# Altium PCB CH32H417QEU-R1.PcbDoc (part 3 of 6)
Units mm, origin at the board's own origin, x right, y up, seen from the top; angles counter-clockwise.
Board outline 125 x 85 mm, 4 copper layers (Top Layer, Layer 1, Layer 2, Bottom Layer), stack 0.603 mm thick; 271 components, 256 nets, 1068 pads, 903 vias.
Unrouted connection lines stored in the file: 143.
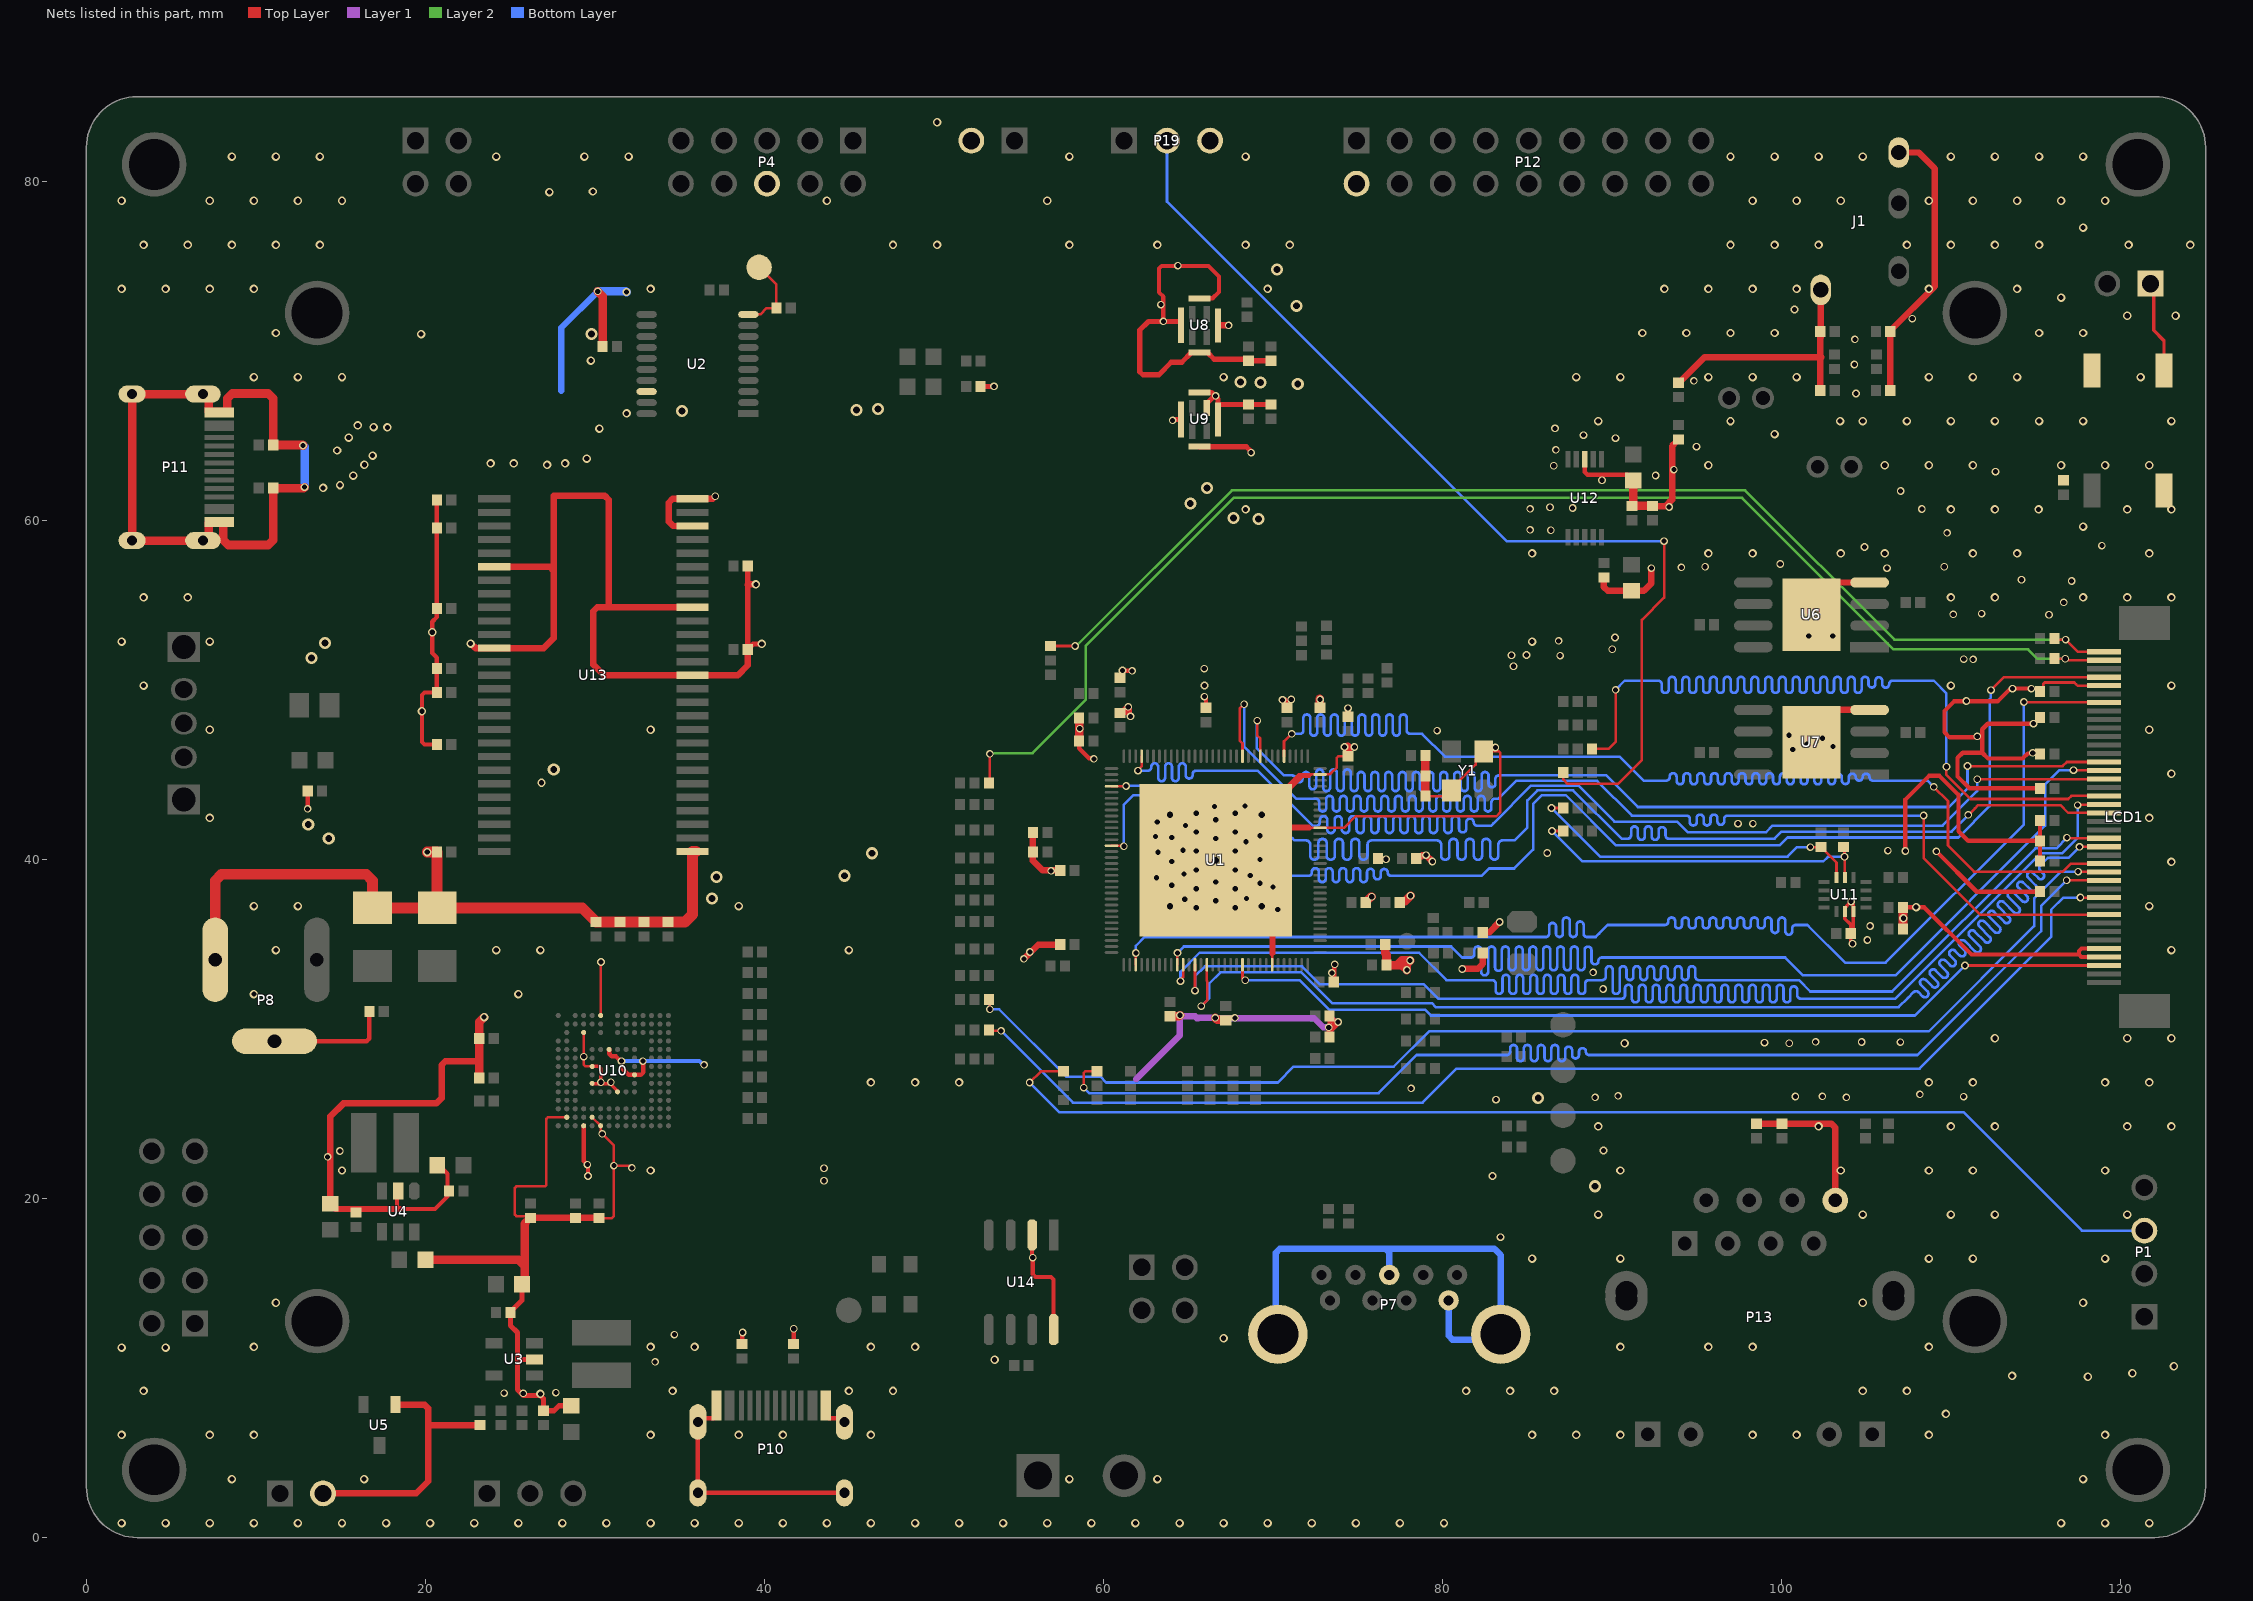
[diagram p5: the nets of this part, all layers, seen from the top]

## Via types
v1: diameter 0.45, hole 0.3, Top Layer to Bottom Layer, tented both sides, 534 vias
v2: diameter 0.5, hole 0.3, Top Layer to Bottom Layer, tented both sides, 320 vias
v3: diameter 0.711, hole 0.406, Top Layer to Bottom Layer, tented both sides, 24 vias
v4: diameter 0.508, hole 0.305, Top Layer to Bottom Layer, tented both sides, 22 vias
v5: diameter 0.7, hole 0.4, Top Layer to Bottom Layer, tented both sides, 3 vias

## Nets (pads, with @x,y where several pads share a name; then routed paths per layer and width w, separated by ;. In a path a pad name is that pad's centre, name@x,y a point inside that pad or via, vN(x,y) a via of type N, cw(c..) or ccw(c..) an arc to the next point about the centre after c; other vN are vias at no path point) (continued)
GND: C1.2 C2.2 C3.2 C4.2 C5.1 C6.2 C7.2 C8.1 C9.2 C10.2 C11.1 C12.1 C13.1 C14.1 C15.1 C16.1 C17.1 C18.2 C19.1 C20.1 C21.2 C22.1 C23.1 C24.1 C25.2 C26.1 C27.1 C28.2 C29.1 C30.2 C31.1 C32.1 C34.2 C35.2 C36.1 C37.1 C38.1 C39.1 C40.1 C41.1 C42.1 C43.1 C46.1 C47.1 C48.1 C49.2 C50.2 C51.1 C52.1 C53.2 C54.2 C55.2 C56.1 C57.1 C58.1 C59.1 C60.1 C61.1 C62.1 C63.1 C64.1 C65.1 C67.1 C69.1 C70.1 C71.1 C72.1 C73.1 C74.1 C75.1 C76.1 C81.1 C82.1 J1.1 J1.4 LCD1.4 LCD1.5 LCD1.36 P3.2 P4.6 P7.0 P7.4 P7.7 P8.2 P8.3 P9.2 P10.0 P10.A1 P10.B1 P11.0 P11.A1 P11.B1 P12.2 P13.8 P19.3 R78.1 R84.1 R86.1 R87.2 R88.2 R89.2 R90.2 R91.2 R107.2 R112.2 R113.2 R114.2 R115.2 R116.2 R117.2 R118.2 R119.2 R121.2 R122.2 R124.2 R125.2 R126.1 R127.2 S1.2 S2.2 U1.0 U1.22 U1.31 U1.122 U2.18 U3.2 U4.2 U5.1 U6.0 U6.4 U7.0 U7.4 U8.5 U9.2 U9.5 U10.A6 U10.C4 U10.E7 U10.G5 U10.H10 U10.J5 U10.K8 U10.N2 U10.N5 U10.P4 U10.P6 U11.6 U11.7 U12.8 U13.6 U13.12 U13.28 U13.41 U13.46 U13.52 U13.54 U14.2 U14.8 Y1.2 Y1.4 | length 608.6
  Top Layer w0.152: C52.1@26.047,18.722 26.047,18.747 26.047,18.852 25.933,18.966 25.358,18.966 25.269,19.055 25.269,20.628 25.358,20.717 27.036,20.717 27.126,20.806 27.126,24.705 27.215,24.794 U10.N2@28.333,24.794 ; v1@29.333,28.413 29.334,28.414 29.334,29.793 U10.C4@29.333,29.794 ; v1(29.336,28.368) 29.333,28.365 29.333,27.907 29.445,27.794 U10.G5@29.833,27.794 ; U10.N5@29.833,24.794 U10.P6@30.333,24.294 30.333,23.99 30.425,23.897 v1(30.425,23.817) ; C54.2@30.246,18.856 30.256,18.846 30.997,18.846 31.116,18.965 v1(31.116,21.939) ; U10.A6@30.333,30.794 30.343,30.805 30.343,33.945 v1(30.354,33.956) ; v1@30.472,23.77 31.116,23.126 v1(31.116,21.939) ; v1(32.171,21.811) 32.09,21.811 31.962,21.939 v1(31.116,21.939) ; U1.0@66.616,39.942 U1.0@69.316,37.242 69.941,36.617 69.941,34.327 ; U1.0@69.763,41.817 69.813,41.867 72.228,41.867 ; U1.0@69.818,35.554 69.824,35.554 69.86,35.518 69.86,34.408 69.941,34.327 ; U1.122@69.941,33.792 69.941,34.327 ; U1.0@70.059,35.476 70.059,34.445 69.941,34.327 ; U1.0@70.532,43.858 U1.0@71.018,44.343 ; U1.0@70.755,44.268 71.504,45.017 71.691,45.017 ; U1.0@71.001,41.741 71.001,41.76 71.04,41.799 72.17,41.799 72.238,41.867 ; U1.0@71.018,44.152 U1.0@71.018,44.343 ; U1.0@71.046,44.177 71.056,44.177 71.766,44.887 ; U1.0@71.091,41.983 72.112,41.983 72.228,41.867 ; C28.2@74.412,46.09 73.848,46.09 73.759,46.001 73.759,45.436 73.41,45.087 73.397,45.087 73.327,45.017 U1.31@72.766,45.017 72.249,45.017 ; C17.1@78.977,43.735 80.176,43.735 Y1.4@80.518,44.077 80.518,44.177 81.945,45.603 81.945,45.903 Y1.2@82.368,46.327 ; Y1.2@82.418,46.377 83.31,46.377 83.4,46.287 83.4,42.788 83.161,42.549 74.863,42.549 74.18,41.867 U1.22@72.766,41.867 72.238,41.867 ; Y1.2@82.425,46.383 Y1.2@82.647,46.606 ; v1@83.051,46.653 83.077,46.58 v1(83.107,46.606) ; R114.2@115.228,49.911 115.43,50.113 115.43,50.359 115.51,50.439 117.259,50.439 117.365,50.333 117.447,50.25 LCD1.36@118.999,50.25 ; U1.0@71.018,44.343 71.561,44.887 ; 71.561,44.887 71.691,45.017 ; 71.561,44.887 71.766,44.887 ; 71.691,45.017 72.249,45.017 ; 71.766,44.887 72.119,44.887 72.249,45.017 ; 72.228,41.867 72.238,41.867
  Top Layer w0.203: U10.J5@29.833,26.794 29.847,26.78 30.511,26.78 30.526,26.766 30.897,26.766 31.211,26.451 31.211,26.442 31.333,26.321 U10.K8@31.333,26.294 ; U10.G5@29.885,27.795 30.229,27.795 30.348,27.676 v1(30.348,26.858) ; v1(104.169,35.028) 104.169,35.094 104.067,35.197 C58.1@104.067,35.642 ; C58.1@104.067,35.642 104.067,36.166 103.728,36.505 U11.6@103.728,36.924 103.728,37.124 103.833,37.23 103.833,37.265 v1(104.093,37.524) 104.093,37.458 104.228,37.323 U11.7@104.228,36.924 104.204,36.9 104.204,35.779 C58.1@104.067,35.642
  Top Layer w0.254: P8.3@11.095,29.284 16.531,29.284 16.68,29.433 C41.1@16.68,31.024 ; v1(13.052,42.982) R87.2@13.052,44.046 ; U4.2@18.217,20.433 18.321,20.537 U4.2@18.321,20.747 ; U4.2@18.321,20.433 18.321,19.531 18.47,19.383 20.559,19.383 21.299,20.123 21.299,21.465 C37.1@20.818,21.947 ; R127.2@20.674,46.781 19.941,46.781 19.792,46.93 19.792,49.705 19.941,49.854 R126.1@20.674,49.854 C75.1@20.674,51.251 20.674,51.903 20.401,52.176 20.401,54.026 20.674,54.299 C73.1@20.674,59.557 C70.1@20.674,61.208 ; U10.P4@29.333,24.294 29.333,22.21 29.59,21.953 v1(29.59,21.326) ; U10.E7@30.833,28.794 30.841,28.786 30.841,28.535 30.99,28.387 31.236,28.387 31.516,28.107 v1(31.562,28.107) 31.562,27.719 31.987,27.294 U10.H10@32.333,27.294 32.704,27.294 32.853,27.443 v1@32.853,28.118 ; P10.A1@37.163,7.792 37.163,7.217 36.99,7.044 36.29,7.044 P10.0@36.068,6.822 P10.0@36.068,2.642 P10.0@44.708,2.642 ; R90.2@38.659,11.416 38.682,11.44 38.682,12.077 v1(38.705,12.1) ; R91.2@41.707,11.416 41.716,11.425 41.716,12.313 v1(41.725,12.322) ; P10.B1@43.613,7.792 43.613,7.217 43.786,7.044 44.486,7.044 P10.0@44.708,6.822 ; v1@55.778,16.516 55.778,16.83 U14.2@55.778,17.856 ; v1(55.82,16.516) 55.82,15.527 55.968,15.378 56.9,15.378 57.048,15.229 U14.8@57.048,12.268 ; C6.2@58.554,46.987 58.554,46.557 59.138,45.973 59.385,45.973 v1(59.423,45.936) ; C7.2@60.971,48.647 C7.2@60.996,48.647 ; C8.1@60.971,50.715 61.075,50.819 61.075,51.108 v1(61.113,51.145) 61.122,51.136 61.67,51.136 v1(61.679,51.127) ; v1(63.526,71.738) 63.526,73.198 63.272,73.452 63.272,74.858 63.421,75.007 66.184,75.007 66.803,74.388 66.803,73.475 66.429,73.101 U8.5@65.659,73.101 ; v1(65.943,49.604) 66.035,49.512 C10.2@66.035,48.946 ; v1@70.726,49.417 70.763,49.38 70.763,48.996 C12.1@70.813,48.946 ; v1@72.705,49.379 72.727,49.379 72.75,49.356 v1@72.759,49.348 ; C15.1@72.75,48.946 72.759,48.955 v1@72.759,49.348 ; v1(72.767,49.438) 72.759,49.43 v1@72.759,49.348 ; C13.1@73.28,29.537 73.329,29.585 73.329,29.908 73.329,30.728 C14.1@73.329,30.753 ; C16.1@73.569,32.762 73.6,32.793 73.6,33.778 v1(73.632,33.809) ; C29.1@74.412,48.42 C29.1@74.415,48.423 ; v1@74.415,48.927 v1(74.418,48.93) ; U12.8@88.379,63.607 88.379,62.856 88.546,62.689 90.904,62.689 C65.1@91.242,62.351 ; C59.1@107.154,37.175 108.402,37.175 111.186,34.391 117.531,34.391 ; v1(107.292,40.502) 107.292,43.541 108.683,44.932 109.304,44.932 110.425,43.811 110.425,41.669 110.997,41.097 R119.2@115.228,41.097 ; v1(109.119,40.478) 111.498,38.1 R117.2@115.228,38.1 ; v1(114.723,50.08) 113.487,50.08 112.733,49.325 110.164,49.325 109.602,48.763 109.602,47.502 109.903,47.201 111.824,47.201 ; v1(114.804,46.288) 114.766,46.251 114.505,46.251 114.207,45.953 112.169,45.953 111.824,46.297 ; v1(114.846,48.008) 112.152,48.008 111.824,47.681 111.824,47.201 ; R116.2@115.156,42.425 115.228,42.353 R116.2@115.228,42.291 R119.2@115.228,41.097 ; R118.2@115.228,39.903 R119.2@115.228,41.097 ; R115.2@115.228,44.196 111.065,44.196 110.369,44.892 110.369,45.996 110.67,46.297 111.824,46.297 ; LCD1.4@118.999,34.25 117.672,34.25 117.531,34.391 ; LCD1.5@118.999,34.75 117.68,34.75 117.531,34.602 117.531,34.391 ; C7.2@60.996,48.647 61.311,48.962 v1@61.413,48.962 ; C7.2@60.996,48.647 61.406,48.647 61.535,48.517 v1@61.589,48.517 ; v1@61.413,48.962 v1@61.432,48.98 ; v1@61.413,48.962 61.413,48.751 61.384,48.722 v1@61.551,48.555 ; v1@61.432,48.98 v1(61.451,48.999) v1@61.451,48.962 ; v1@61.432,48.98 v1@61.451,48.962 ; v1@61.451,48.962 61.488,48.924 v1@61.488,48.908 ; v1@61.451,48.962 61.451,48.946 v1@61.488,48.908 ; v1@61.488,48.908 61.551,48.846 v1@61.551,48.608 ; v1@61.488,48.908 61.488,48.67 v1@61.551,48.608 ; v1@61.551,48.555 v1@61.551,48.608 ; v1@61.551,48.555 v1@61.589,48.517 ; v1@61.551,48.608 61.589,48.57 v1@61.589,48.517 ; 111.824,46.297 111.824,47.201
  Top Layer w0.3: C32.1@25.697,14.936 25.697,14 25.007,13.31 C31.1@25.007,13.285 25.007,12.518 25.429,12.096 25.429,10.334 ; U3.2@26.431,10.509 25.605,10.509 25.429,10.334 ; C34.2@28.603,7.776 27.87,7.776 27.577,7.483 C35.2@26.952,7.483 26.952,8.208 26.777,8.384 25.77,8.384 25.429,8.725 25.429,10.334
  Top Layer w0.305: C71.1@39.011,52.394 C71.1@39.011,52.419 ; C72.1@39.011,57.296 39.011,56.213 C71.1@39.011,52.419 ; v2(39.833,52.717) 39.334,52.717 39.183,52.567 39.158,52.567 C71.1@39.011,52.419 ; R84.1@52.744,67.903 v1(53.536,67.903) ; v1(64.071,65.9) 64.111,65.9 64.164,65.953 U9.5@64.559,65.953 ; U8.5@64.559,71.501 64.559,71.716 64.536,71.738 v1(63.526,71.738) 62.652,71.738 62.135,71.222 62.135,68.773 62.314,68.594 63.262,68.594 63.992,69.325 64.608,69.325 65.184,69.901 U8.5@65.659,69.901 66.134,69.901 66.53,69.505 67.287,69.505 C82.1@68.483,69.505 ; U9.5@65.659,64.353 65.669,64.343 68.419,64.343 68.702,64.06 v1(68.702,63.997) ; U9.5@65.659,67.553 66.364,67.553 66.568,67.35 v1(66.607,67.35) ; U9.2@66.084,66.628 66.084,66.903 66.503,67.322 66.579,67.322 v1(66.607,67.35) ; U9.5@66.751,66.846 66.751,67.166 66.607,67.31 v1(66.607,67.35) ; U9.5@66.759,65.953 66.759,66.846 C46.1@69.915,66.846 ; C82.1@68.483,69.415 C81.1@69.869,69.415
  Top Layer w0.381: P9.2@14.094,2.687 14.172,2.609 19.452,2.609 20.169,3.326 20.169,7.618 19.946,7.841 U5.1@18.236,7.841 ; C38.1@14.392,19.697 14.392,24.842 15.159,25.61 20.64,25.61 20.95,25.92 20.95,27.871 21.173,28.094 23.173,28.094 ; C38.1@14.706,19.383 18.47,19.383 ; 20.185,6.604 20.215,6.633 R86.1@23.209,6.633 ; v2(22.664,52.729) 22.696,52.729 22.955,52.47 U13.12@24.064,52.47 26.976,52.47 27.555,53.05 27.555,57.047 ; U13.6@24.064,57.27 27.332,57.27 27.555,57.047 ; C52.1@25.918,18.593 C52.1@26.047,18.722 ; C52.1@26.047,18.747 26.157,18.856 C52.1@26.182,18.856 C53.2@28.849,18.856 C54.2@30.246,18.856 ; U13.46@35.748,54.87 30.81,54.87 ; U13.52@35.748,59.67 34.614,59.67 34.352,59.933 34.352,61.047 34.575,61.27 U13.54@35.748,61.27 36.942,61.27 v1(37.093,61.422) ; C71.1@39.011,52.394 39.011,51.453 38.428,50.87 U13.41@35.748,50.87 30.525,50.87 29.897,51.497 29.897,54.638 30.129,54.87 30.81,54.87 ; 39.011,56.213 39.023,56.225 v2(39.489,56.225) ; v1(55.296,34.135) 56.139,34.977 C1.2@57.438,34.977 ; C4.2@55.832,41.603 C3.2@55.832,40.433 55.832,39.928 56.408,39.352 C2.2@57.438,39.352 ; U8.5@66.759,71.501 v1(67.376,71.501) ; v1@73.329,29.908 v1(73.832,30.411) 73.818,30.424 73.633,30.424 C14.1@73.329,30.728 ; C29.1@74.415,48.423 v1@74.415,48.927 ; C26.1@78.445,40.065 78.445,40.09 78.554,40.2 78.759,40.2 78.798,40.239 79.003,40.239 v1(79.016,40.252) ; v1(79.016,40.252) 79.365,39.904 v1@79.358,39.897 ; v1(81.154,33.541) 82.07,33.541 82.368,33.839 C18.2@82.368,34.494 ; C21.2@82.368,35.695 82.739,35.695 v1(83.356,36.312) ; C63.1@89.506,56.631 89.506,56.072 89.729,55.849 C64.1@91.138,55.849 91.87,55.849 92.311,56.29 v1(92.311,57.18) ; C62.1@92.235,60.836 93.133,60.836 93.528,61.23 93.528,64.383 93.779,64.635 93.779,64.66 93.889,64.769 R121.2@93.914,64.769 ; R124.2@93.914,68.122 93.939,68.122 95.442,69.625 102.272,69.625 ; C57.1@98.503,24.409 C56.1@100.002,24.409 102.935,24.409 103.158,24.186 P13.8@103.158,19.888 ; U6.0@102.252,56.394 102.309,56.337 U6.4@105.181,56.337 ; R125.2@102.272,67.651 102.272,69.625 ; U7.0@102.293,48.811 102.301,48.819 U7.4@105.181,48.819 ; 102.299,70.793 102.3,70.794 C69.1@102.3,71.043 ; J1.1@102.3,73.6 C69.1@102.3,71.043 ; 102.344,69.625 102.272,69.625 ; C69.1@102.351,71.043 C69.1@102.3,71.043 ; R122.2@106.399,67.651 106.399,70.947 C67.1@106.449,70.997 ; C67.1@106.399,71.153 106.399,71.178 109.022,73.801 109.022,80.755 108.077,81.7 106.92,81.7 J1.4@106.806,81.815 ; 27.555,57.047 27.555,61.444 30.587,61.444 30.81,61.221 30.81,54.87 ; 102.272,69.625 102.272,71.018 102.296,71.043 C69.1@102.3,71.043
  Top Layer w0.508: P11.0@2.696,58.575 P11.0@2.696,67.45 P11.0@6.876,67.45 6.997,67.45 7.225,67.223 7.225,66.401 8.311,66.401 8.311,67.19 8.609,67.488 10.721,67.488 11.018,67.19 R88.2@11.018,64.445 12.752,64.445 v1(12.777,64.42) ; P11.0@2.696,58.81 P11.0@6.876,58.81 6.997,58.81 7.225,59.037 7.225,59.859 8.067,59.859 8.067,58.846 8.365,58.549 10.721,58.549 11.018,58.846 R89.2@11.018,61.905 12.807,61.905 v1(12.868,61.966) ; C40.1@19.997,16.389 25.492,16.389 25.848,16.033 ; R107.2@23.173,27.111 23.173,28.094 C51.1@23.173,29.45 23.173,30.413 v2(23.46,30.7) ; C32.1@25.848,14.936 25.848,16.033 ; C52.1@25.918,18.593 25.848,18.523 25.848,16.033 ; v1(30.162,73.507) 30.449,73.22 C30.2@30.449,70.259 ; C6.2@58.554,46.987 C5.1@58.554,48.34 ; C9.2@63.903,30.748 64.443,30.748 v1(64.506,30.811) ; v1(66.585,30.654) 66.692,30.547 67.158,30.547 C11.1@67.204,30.501 ; C15.1@72.75,48.946 72.75,49.356 72.75,49.474 v1@72.757,49.48 ; v1@74.409,46.636 74.409,46.092 C28.2@74.412,46.09 ; C25.2@75.464,37.469 75.464,37.494 75.771,37.8 v1(75.816,37.8) ; C23.1@76.608,34.972 76.608,34.459 76.684,34.382 C22.1@76.684,33.763 77.308,33.763 ; C24.1@77.464,37.469 77.464,37.494 77.51,37.54 77.778,37.54 v1(78.099,37.861) ; C17.1@78.977,43.735 C20.1@78.977,44.923 R78.1@78.977,46.128 ; C65.1@91.242,62.351 91.242,60.934 C61.1@91.166,60.858 C62.1@92.374,60.858 ; C60.1@107.154,35.905 107.154,36.515 v2(107.17,36.531) 107.154,36.547 C59.1@107.154,37.175 ; 77.308,33.763 77.588,34.043 v1(78.083,34.043) 77.889,33.849 v1(77.889,33.478) 77.603,33.763 77.308,33.763
  Top Layer w0.635: P8.2@7.595,34.084 7.595,38.75 7.967,39.122 16.508,39.122 16.88,38.75 C43.1@16.88,37.145 C42.1@20.69,37.145 ; v2(20.102,40.435) 20.105,40.433 20.672,40.433 C74.1@20.674,40.431 20.674,37.161 C42.1@20.69,37.145 ; U13.28@35.956,40.47 U13.28@35.748,40.47 35.748,36.76 35.304,36.316 C48.1@34.312,36.316 C49.2@32.899,36.316 C50.2@31.485,36.316 C55.2@30.071,36.316 29.241,37.145 C42.1@20.69,37.145
  Layer 1 w0.381: 61.916,27.043 64.499,29.627 64.499,30.805 v1(64.506,30.811) ; v1@64.506,30.748 65.397,30.748 65.506,30.639 65.598,30.639 65.613,30.654 v1(66.585,30.654) ; v1@66.579,30.639 72.426,30.639 72.954,30.111 73.262,30.111 v1@73.275,30.098 ; v1(73.281,30.098) 73.294,30.098 73.635,30.438 v1@73.812,30.438
  Bottom Layer w0.254: v1(31.562,28.107) v1(32.822,28.107) 36.157,28.107 36.399,27.865 v1@36.45,27.865
  Bottom Layer w0.381: 28.017,67.639 28.011,67.646 28.011,71.356 v1(30.162,73.507) ; P7.0@69.649,12.7 70.166,13.217 70.166,16.81 70.389,17.033 76.628,17.033 ; P7.0@70.08,11.642 P7.0@70.281,11.843 ; P7.7@76.851,15.343 76.851,16.81 76.628,17.033 ; P7.4@80.351,13.843 80.351,11.9 80.574,11.677 P7.0@82.796,11.677 ; P7.0@83.887,12.108 83.421,12.573 83.421,16.664 83.052,17.033 76.628,17.033
  Bottom Layer w0.508: v1(12.777,64.42) 12.868,64.329 v1(12.868,61.966) ; v1(30.162,73.507) 31.823,73.507 v1(31.858,73.472)
  other v1: 24.643,8.518 25.767,8.511 27.695,8.547 33.549,10.364 34.681,11.975 83.414,17.727 43.505,21.051 82.939,21.332 43.505,21.789 29.547,21.996 14.228,22.456 14.951,22.801 89.486,22.831 83.141,25.835 88.991,25.968 103.815,25.965 100.805,26.018 110.726,26.008 102.394,26.03 90.346,26.059 108.149,26.145 78.137,26.495 30.933,26.858 36.433,27.884 100.442,29.16 98.983,29.198 101.999,29.242 104.715,29.236 106.995,29.225 67.739,30.654 89.46,32.357 73.467,33.315 88.878,33.345 55.652,34.539 105.052,35.252 105.212,36.074 70.272,37.044 64.787,37.654 68.422,37.69 69.984,38.372 63.126,38.92 68.647,39.046 64.733,39.136 56.905,39.326 79.388,39.882 76.654,40.011 86.166,40.382 63.198,40.428 106.261,40.52 64.679,40.545 68.395,41.048 63.072,41.344 64.822,42.012 97.416,42.111 98.298,42.111 63.162,42.206 66.543,43.13 68.344,43.15 100.646,46.488 74.206,46.636 74.789,46.636 103.014,46.655 101.495,46.82 102.397,47.152 111.53,47.265 100.436,47.33 79.676,47.598 58.59,47.721 61.589,48.441 110.889,49.344 70.548,49.417 71.068,49.435 113.612,50.076 65.952,50.265 65.935,51.256 84.174,51.397 110.735,51.817 111.29,51.807 86.924,52.022 84.056,52.046 84.942,52.058 90.003,52.402 86.841,52.896 90.164,53.091 101.594,53.193 103.01,53.18 115.762,54.433 110.115,54.455 111.787,54.501 116.632,55.167 117.096,56.424 114.143,56.5 106.21,57.182 94.077,57.229 95.479,57.267 109.585,57.268 99.912,57.429 104.882,58.43 118.879,58.511 109.751,59.262 86.379,59.417 85.162,59.442 85.16,60.684 108.267,60.674 87.668,60.729 86.333,60.774 93.354,60.787 107.008,61.734 89.397,62.37 92.557,62.651 112.607,62.878 93.635,62.995 86.553,63.221 86.679,64.158 94.968,64.353 90.193,64.852 88.306,65.026 86.625,65.428 104.383,67.488 94.812,68.227 104.28,69.196 104.314,70.675 107.695,71.901 100.749,72.44 63.373,72.724 64.378,75.027
  other v2: 2.077,0.854 4.677,0.854 7.277,0.854 9.877,0.854 12.477,0.854 15.077,0.854 17.677,0.854 20.277,0.854 22.877,0.854 25.477,0.854 28.077,0.854 30.677,0.854 33.277,0.854 35.877,0.854 38.477,0.854 41.077,0.854 43.677,0.854 46.277,0.854 48.877,0.854 51.477,0.854 54.077,0.854 56.677,0.854 59.277,0.854 61.877,0.854 64.477,0.854 67.077,0.854 69.677,0.854 72.277,0.854 74.877,0.854 77.477,0.854 80.077,0.854 116.477,0.854 119.077,0.854 121.677,0.854 8.577,3.454 16.377,3.454 57.977,3.454 63.177,3.454 117.777,3.454 2.077,6.054 7.277,6.054 9.877,6.054 33.277,6.054 38.477,6.054 41.077,6.054 46.277,6.054 85.277,6.054 87.877,6.054 90.477,6.054 98.277,6.054 100.877,6.054 108.677,6.054 119.077,6.054 109.676,7.297 26.777,8.476 3.377,8.654 34.577,8.654 44.977,8.654 47.577,8.654 81.377,8.654 83.977,8.654 86.577,8.654 104.777,8.654 107.377,8.654 118.055,9.488 113.585,9.534 120.683,9.693 123.127,10.109 53.569,10.492 2.077,11.203 4.677,11.203 9.877,11.254 33.277,11.254 35.877,11.254 46.277,11.254 48.877,11.254 90.477,11.254 95.677,11.254 98.277,11.254 108.677,11.254 67.077,11.762 11.177,13.854 104.777,13.854 117.777,13.854 85.277,16.454 90.477,16.454 108.677,16.454 111.277,16.454 119.077,16.454 89.177,19.054 104.777,19.054 109.977,19.054 112.577,19.054 120.377,19.054 15.077,21.654 33.277,21.654 90.477,21.654 103.477,21.654 108.677,21.654 111.277,21.654 119.077,21.654 89.177,24.254 102.177,24.254 109.977,24.254 112.577,24.254 120.377,24.254 122.977,24.254 46.277,26.854 48.877,26.854 51.477,26.854 108.677,26.854 111.277,26.854 119.077,26.854 121.677,26.854 90.734,29.159 112.577,29.454 120.377,29.454 122.977,29.454 9.877,32.054 25.477,32.054 11.177,34.654 24.177,34.654 26.777,34.654 44.977,34.654 122.977,34.654 107.92,37.194 9.877,37.254 12.477,37.254 38.477,37.254 121.677,37.254 122.977,39.854 7.277,42.454 121.677,42.454 26.844,44.525 122.977,45.054 7.277,47.654 33.277,47.654 121.677,47.654 19.792,48.744 3.377,50.254 109.977,50.254 122.977,50.254 2.077,52.854 7.277,52.854 85.277,52.854 20.401,53.401 3.377,55.454 5.977,55.454 109.977,55.454 112.577,55.454 117.777,55.454 120.377,55.454 122.977,55.454 85.277,58.054 95.677,58.054 98.277,58.054 103.477,58.054 106.077,58.054 111.277,58.054 113.877,58.054 121.677,58.054 117.777,59.638 68.377,60.654 109.977,60.654 112.577,60.654 115.149,60.654 120.377,60.654 122.977,60.654 13.966,61.919 14.958,62.086 15.742,62.642 95.677,63.254 106.077,63.254 108.677,63.254 111.277,63.254 116.477,63.254 119.077,63.254 121.677,63.254 16.396,63.283 27.18,63.274 23.846,63.368 25.205,63.368 28.236,63.368 29.51,63.64 16.887,63.816 14.786,64.123 15.474,64.881 99.577,65.092 30.261,65.42 17.749,65.487 16.945,65.499 16.003,65.603 89.177,65.854 96.977,65.854 103.447,65.854 104.777,65.854 107.377,65.854 109.977,65.854 112.577,65.854 115.177,65.854 117.777,65.854 122.977,65.854 31.869,66.307 9.877,68.454 12.477,68.454 15.077,68.454 67.077,68.454 87.877,68.454 90.477,68.454 95.677,68.454 98.277,68.454 100.877,68.454 108.677,68.454 111.277,68.454 113.877,68.454 121.169,68.454 29.76,69.422 19.74,70.988 11.177,71.054 91.777,71.054 94.377,71.054 96.977,71.054 99.577,71.054 115.177,71.054 117.777,71.054 120.377,72.07 123.231,72.07 116.477,73.146 2.077,73.654 4.677,73.654 7.277,73.654 9.877,73.654 33.277,73.654 69.677,73.654 93.077,73.654 95.677,73.654 98.277,73.654 100.877,73.654 108.677,73.654 113.877,73.654 3.377,76.254 5.977,76.254 8.577,76.254 11.177,76.254 13.777,76.254 47.577,76.254 50.177,76.254 57.977,76.254 63.177,76.254 68.377,76.254 70.977,76.254 96.977,76.254 99.577,76.254 102.177,76.254 107.377,76.254 109.977,76.254 112.577,76.254 115.177,76.254 120.453,76.254 124.095,76.254 117.777,77.27 2.077,78.854 7.277,78.854 9.877,78.854 12.477,78.854 15.077,78.854 43.677,78.854 56.677,78.854 98.277,78.854 100.877,78.854 103.477,78.854 108.677,78.854 111.277,78.854 113.877,78.854 116.477,78.854 119.077,78.854 27.315,79.362 29.876,79.401 8.577,81.454 11.177,81.454 13.777,81.454 24.177,81.454 29.377,81.454 31.977,81.454 57.977,81.454 68.377,81.454 96.977,81.454 99.577,81.454 102.177,81.454 104.777,81.454 109.977,81.454 112.577,81.454 115.177,81.454 117.777,81.454 50.177,83.486
  other v3: 88.982,20.724 85.634,25.93 36.89,37.689 37.166,38.97 44.708,39.041 46.331,40.367 14.293,41.229 13.086,42.056 27.565,45.303 13.285,51.892 14.063,52.78 69.13,60.084 67.661,60.149 65.112,60.994 66.101,61.917 35.12,66.447 45.421,66.503 46.695,66.569 71.45,68.05 69.259,68.133 68.068,68.162 29.782,71.005 71.389,72.658 70.23,74.811
  other v4: 65.464,37.156 67.769,37.156 66.616,37.562 65.464,38.27 67.769,38.27 64.016,38.482 69.216,38.596 66.616,38.677 65.464,39.385 67.769,39.385 64.016,39.885 69.216,39.999 65.464,40.499 67.769,40.499 66.616,41.233 64.016,41.287 69.216,41.401 65.464,41.613 67.769,41.613 66.616,42.347 65.464,42.727 67.769,42.727
GPIO_PC12: P1.3 R40.1 | length 71.6
  Top Layer w0.152: v1(55.635,26.843) 56.3,27.507 R40.1@57.632,27.507
  Bottom Layer w0.152: v1(55.635,26.843) 57.377,25.101 110.717,25.101 117.708,18.11 P1.3@121.387,18.11
HSADC: P19.2 R63.1 | length 60.4
  Top Layer w0.152: R63.1@87.114,45.127 87.114,44.71 87.364,44.46 90.347,44.46 91.748,45.862 91.748,54.139 93.057,55.448 v1(93.057,58.778)
  Bottom Layer w0.152: P19.2@63.74,82.4 63.74,78.806 83.782,58.764 93.043,58.764 v1(93.057,58.778)
I3C_SCL: R6.1 R22.2 U11.13 | length 20.6
  Top Layer w0.152: v1(86.451,41.678) R6.1@87.114,41.678 ; R22.2@103.638,40.728 103.7,40.666 v1(103.7,40.16) 103.714,40.146 103.714,38.937 U11.13@103.728,38.924
  Bottom Layer w0.152: v1(86.451,41.678) 88.241,39.888 102.447,39.888 102.719,40.16 v1(103.7,40.16)
I3C_SDA: R8.1 R20.1 U11.14 | length 20.2
  Top Layer w0.152: v1(86.419,43.035) R8.1@87.114,43.035 ; v1(101.684,40.728) R20.1@102.317,40.728 103.228,39.817 U11.14@103.228,38.924
  Bottom Layer w0.152: v1(86.419,43.035) 89.287,40.167 100.342,40.167 100.903,40.728 v1(101.684,40.728)
IAP: IAP1.1 R82.1 U2.10 | length 4.6
  Top Layer w0.152: U2.10@39.044,72.148 39.757,72.148 40.128,72.519 R82.1@40.699,72.519 40.699,73.906 IAP1.1@39.679,74.927
IIC_SCL: LCD1.39 R9.1 R15.1 | length 80.2
  Top Layer w0.152: R9.1@53.237,44.519 53.292,44.573 v1(53.292,46.227) ; R15.1@116.078,51.867 116.108,51.837 116.801,51.837 116.898,51.74 118.988,51.74 LCD1.39@118.999,51.75
  Layer 2 w0.152: v1(53.292,46.227) 53.339,46.274 55.805,46.274 58.941,49.41 58.941,52.605 67.669,61.334 97.657,61.334 106.599,52.391 114.527,52.391 115.081,51.837 v1(116.72,51.837)
IIC_SDA: LCD1.40 R17.2 R72.1 | length 70.6
  Top Layer w0.152: R72.1@56.863,52.595 56.868,52.59 v1(58.318,52.59) ; R17.2@116.078,53.021 116.128,52.971 v1(116.741,52.971) 117.461,52.25 LCD1.40@118.999,52.25
  Layer 2 w0.152: v1(58.318,52.59) 58.386,52.59 67.569,61.773 97.839,61.773 106.641,52.971 v1(116.741,52.971)
KEY: P2.1 S1.1 | length 5.5
  Top Layer w0.203: P2.1@121.742,73.965 121.938,73.769 121.938,71.212 122.547,70.603 S1.1@122.547,68.843
LCD_B3: LCD1.18 U1.107 | length 84.6
  Top Layer w0.152: v1(64.536,32.822) 64.536,32.902 64.691,33.057 U1.107@64.691,33.792 ; v1(116.819,41.284) 116.852,41.25 LCD1.18@118.999,41.25
  Bottom Layer w0.152: v1(64.536,32.822) 64.536,33.373 65.661,34.498 78.61,34.498 80.223,32.885 82.049,32.885 82.437,32.885 82.92,32.885 cw(c82.92,32.682) 83.123,32.682 83.123,32.272 ccw(c83.326,32.272) 83.529,32.272 83.529,32.993 cw(c83.732,32.993) 83.936,32.993 83.936,32.272 ccw(c84.139,32.272) 84.342,32.272 84.342,32.993 cw(c84.545,32.993) 84.748,32.993 84.748,32.272 ccw(c84.952,32.272) 85.155,32.272 85.155,32.993 cw(c85.358,32.993) 85.561,32.993 85.561,32.272 ccw(c85.764,32.272) 85.968,32.272 85.968,32.993 cw(c86.171,32.993) 86.374,32.993 86.374,32.272 ccw(c86.577,32.272) 86.78,32.272 86.78,32.993 cw(c86.984,32.993) 87.187,32.993 87.187,32.272 ccw(c87.39,32.272) 87.593,32.272 87.593,32.993 cw(c87.796,32.993) 88,32.993 88,32.272 ccw(c88.203,32.272) 88.406,32.272 88.406,32.682 cw(c88.609,32.682) 88.609,32.885 89.343,32.885 89.419,32.885 ccw(c89.419,33.088) 89.622,33.088 89.622,33.499 cw(c89.825,33.499) 90.028,33.499 90.028,32.272 ccw(c90.232,32.272) 90.435,32.272 90.435,33.499 cw(c90.638,33.499) 90.841,33.499 90.841,33.088 ccw(c91.044,33.088) 91.248,33.088 91.248,33.499 cw(c91.451,33.499) 91.654,33.499 91.654,33.088 ccw(c91.857,33.088) 92.06,33.088 92.06,33.499 cw(c92.264,33.499) 92.467,33.499 92.467,33.088 ccw(c92.67,33.088) 92.873,33.088 92.873,33.499 cw(c93.076,33.499) 93.28,33.499 93.28,33.088 ccw(c93.483,33.088) 93.686,33.088 93.686,33.499 cw(c93.889,33.499) 94.092,33.499 94.092,33.088 ccw(c94.296,33.088) 94.499,33.088 94.499,33.499 cw(c94.702,33.499) 94.905,33.499 94.905,33.088 ccw(c95.108,33.088) 95.108,32.885 95.893,32.885 101.008,32.885 101.681,32.212 106.513,32.212 114.959,40.658 116.193,40.658 v1(116.819,41.284)
LCD_B4: LCD1.17 U1.111 | length 84.6
  Top Layer w0.152: v1(65.761,31.349) 66.124,31.712 66.124,32.807 66.091,32.84 U1.111@66.091,33.792 ; v1(117.564,40.747) 117.566,40.749 118.997,40.749 LCD1.17@118.999,40.75
  Bottom Layer w0.152: v1(65.761,31.349) 66.241,31.829 66.241,32.699 66.881,33.339 71.665,33.339 73.481,31.523 79.359,31.523 79.589,31.293 106.898,31.293 107.435,31.83 107.776,32.171 cw(c107.92,32.028) 108.063,32.171 108.307,31.928 ccw(c108.451,32.072) 108.594,31.928 ccw(c108.451,32.072) 108.594,32.215 108.209,32.601 cw(c108.353,32.744) 108.209,32.888 cw(c108.353,32.744) 108.496,32.888 108.882,32.503 ccw(c109.025,32.646) 109.169,32.503 ccw(c109.025,32.646) 109.169,32.79 108.784,33.175 cw(c108.927,33.319) 108.784,33.463 cw(c108.927,33.319) 109.071,33.463 109.456,33.077 ccw(c109.6,33.221) 109.744,33.077 ccw(c109.6,33.221) 109.744,33.365 109.358,33.75 cw(c109.502,33.894) 109.358,34.038 cw(c109.502,33.894) 109.646,34.038 109.922,33.762 ccw(c110.065,33.905) 110.209,33.762 ccw(c110.065,33.905) 110.209,34.049 109.933,34.325 cw(c110.077,34.469) 109.933,34.612 cw(c110.077,34.469) 110.221,34.612 110.491,34.342 ccw(c110.635,34.486) 110.778,34.342 ccw(c110.635,34.486) 110.778,34.629 110.508,34.9 cw(c110.652,35.043) 110.508,35.187 cw(c110.652,35.043) 110.795,35.187 111.405,34.578 ccw(c111.548,34.721) 111.692,34.578 ccw(c111.548,34.721) 111.692,34.865 111.083,35.474 cw(c111.226,35.618) 111.083,35.762 cw(c111.226,35.618) 111.37,35.762 111.979,35.152 ccw(c112.123,35.296) 112.267,35.152 ccw(c112.123,35.296) 112.267,35.44 111.657,36.049 cw(c111.801,36.193) 111.657,36.336 cw(c111.801,36.193) 111.945,36.336 112.554,35.727 ccw(c112.698,35.871) 112.841,35.727 ccw(c112.698,35.871) 112.841,36.014 112.232,36.624 cw(c112.376,36.768) 112.232,36.911 cw(c112.376,36.768) 112.519,36.911 113.129,36.302 ccw(c113.272,36.446) 113.416,36.302 ccw(c113.272,36.446) 113.416,36.589 112.807,37.199 cw(c112.951,37.342) 112.807,37.486 cw(c112.951,37.342) 113.094,37.486 113.704,36.877 ccw(c113.847,37.02) 113.991,36.877 ccw(c113.847,37.02) 113.991,37.164 113.382,37.773 cw(c113.525,37.917) 113.382,38.061 cw(c113.525,37.917) 113.669,38.061 114.177,37.553 ccw(c114.321,37.696) 114.464,37.553 ccw(c114.321,37.696) 114.464,37.84 113.956,38.348 cw(c114.1,38.492) 113.956,38.635 cw(c114.1,38.492) 114.244,38.635 114.688,38.191 ccw(c114.831,38.335) 114.975,38.191 ccw(c114.831,38.335) 114.975,38.479 114.531,38.923 cw(c114.675,39.066) 114.531,39.21 cw(c114.675,39.066) 114.818,39.21 115.134,38.895 ccw(c115.277,39.039) 115.421,38.895 ccw(c115.277,39.039) 115.421,39.182 115.248,39.356 cw(c115.391,39.499) 115.248,39.643 115.69,40.085 115.704,40.099 116.917,40.099 v1(117.564,40.747)
LCD_B5: LCD1.15 U1.37 | length 84.6
  Top Layer w0.152: U1.37@70.641,46.092 70.641,46.965 71.087,47.41 v1(71.095,47.41) ; v1(108.964,44.283) 109.804,43.443 109.804,40.823 111.34,39.286 116.585,39.286 117.05,39.75 LCD1.15@118.999,39.75
  Bottom Layer w0.152: v1(71.095,47.41) 71.503,47.41 71.579,47.41 ccw(c71.579,47.613) 71.782,47.613 71.782,48.35 cw(c71.986,48.35) 72.189,48.35 72.189,47.508 ccw(c72.392,47.508) 72.595,47.508 72.595,48.35 cw(c72.798,48.35) 73.002,48.35 73.002,47.508 ccw(c73.205,47.508) 73.408,47.508 73.408,48.35 cw(c73.611,48.35) 73.814,48.35 73.814,47.508 ccw(c74.018,47.508) 74.221,47.508 74.221,48.273 cw(c74.424,48.273) 74.627,48.273 74.627,47.508 ccw(c74.83,47.508) 75.034,47.508 75.034,48.35 cw(c75.237,48.35) 75.44,48.35 75.44,47.508 ccw(c75.643,47.508) 75.846,47.508 75.846,48.35 cw(c76.05,48.35) 76.253,48.35 76.253,47.508 ccw(c76.456,47.508) 76.659,47.508 76.659,48.35 cw(c76.862,48.35) 77.066,48.35 77.066,47.508 ccw(c77.269,47.508) 77.472,47.508 77.472,48.35 cw(c77.675,48.35) 77.878,48.35 77.878,47.613 ccw(c78.082,47.613) 78.082,47.41 78.789,47.41 80.137,46.063 90.439,46.063 91.848,44.653 93.11,44.653 93.187,44.653 ccw(c93.187,44.856) 93.39,44.856 93.39,44.886 cw(c93.593,44.886) 93.796,44.886 93.796,44.639 ccw(c93.999,44.639) 94.203,44.639 94.203,44.886 cw(c94.406,44.886) 94.609,44.886 94.609,44.639 ccw(c94.812,44.639) 95.015,44.639 95.015,44.886 cw(c95.219,44.886) 95.422,44.886 95.422,44.639 ccw(c95.625,44.639) 95.828,44.639 95.828,44.886 cw(c96.031,44.886) 96.235,44.886 96.235,44.639 ccw(c96.438,44.639) 96.641,44.639 96.641,44.886 cw(c96.844,44.886) 97.047,44.886 97.047,44.639 ccw(c97.251,44.639) 97.454,44.639 97.454,44.886 cw(c97.657,44.886) 97.86,44.886 97.86,44.639 ccw(c98.063,44.639) 98.267,44.639 98.267,44.886 cw(c98.47,44.886) 98.673,44.886 98.673,44.639 ccw(c98.876,44.639) 99.079,44.639 99.079,44.886 cw(c99.283,44.886) 99.486,44.886 99.486,44.639 ccw(c99.689,44.639) 99.892,44.639 99.892,44.886 cw(c100.095,44.886) 100.299,44.886 100.299,44.639 ccw(c100.502,44.639) 100.705,44.639 100.705,44.886 cw(c100.908,44.886) 101.111,44.886 101.111,44.639 ccw(c101.315,44.639) 101.518,44.639 101.518,44.886 cw(c101.721,44.886) 101.924,44.886 101.924,44.639 ccw(c102.127,44.639) 102.331,44.639 102.331,44.886 cw(c102.534,44.886) 102.737,44.886 102.737,44.639 ccw(c102.94,44.639) 103.143,44.639 103.143,44.842 cw(c103.347,44.842) 103.55,44.842 103.55,44.653 ccw(c103.753,44.653) 103.956,44.653 103.956,44.856 cw(c104.159,44.856) 104.363,44.856 ccw(c104.566,44.856) 104.769,44.856 cw(c104.972,44.856) 105.175,44.856 ccw(c105.379,44.856) 105.379,44.653 105.939,44.653 108.594,44.653 v1(108.964,44.283)
LCD_B6: LCD1.14 R28.1 | length 74.2
  Top Layer w0.152: R28.1@53.237,31.735 53.289,31.683 v1(53.289,31.165) ; v1(117.482,39.286) 117.5,39.268 118.981,39.268 LCD1.14@118.999,39.25
  Bottom Layer w0.152: v1(53.289,31.165) 53.832,31.165 57.811,27.186 59.808,27.186 60.15,26.845 70.281,26.845 71.212,27.776 77.114,27.776 79.195,29.857 108.67,29.857 114.887,36.074 114.887,37.709 116.465,39.286 v1(117.482,39.286)
LCD_B7: LCD1.13 R42.1 | length 75.9
  Top Layer w0.152: v1(58.828,26.54) 58.828,27.418 58.917,27.507 R42.1@59.613,27.507 ; v1(116.8,38.772) 116.805,38.777 118.972,38.777 LCD1.13@118.999,38.75
  Bottom Layer w0.152: v1(58.828,26.54) 59.147,26.221 59.261,26.221 59.262,26.219 76.214,26.219 78.46,28.465 83.696,28.465 83.772,28.465 ccw(c83.772,28.668) 83.975,28.668 83.975,28.857 cw(c84.179,28.857) 84.382,28.857 84.382,28.303 ccw(c84.585,28.303) 84.788,28.303 84.788,28.857 cw(c84.991,28.857) 85.195,28.857 85.195,28.303 ccw(c85.398,28.303) 85.601,28.303 85.601,28.857 cw(c85.804,28.857) 86.007,28.857 86.007,28.303 ccw(c86.211,28.303) 86.414,28.303 86.414,28.857 cw(c86.617,28.857) 86.82,28.857 86.82,28.303 ccw(c87.023,28.303) 87.227,28.303 87.227,28.754 cw(c87.43,28.754) 87.633,28.754 87.633,28.465 ccw(c87.836,28.465) 88.039,28.465 88.039,28.668 cw(c88.243,28.668) 88.446,28.668 ccw(c88.649,28.668) 88.649,28.465 95.05,28.465 107.993,28.465 115.294,35.766 115.294,37.266 v1(116.8,38.772)
LCD_BL: LCD1.3 U1.117 | length 53.7
  Top Layer w0.152: U1.117@68.191,33.792 68.191,33.006 68.321,32.876 v1(68.356,32.876) ; v1(110.806,33.745) 110.809,33.748 118.996,33.748 LCD1.3@118.999,33.75
  Bottom Layer w0.152: v1(68.356,32.876) 68.365,32.885 71.563,32.885 73.301,31.148 78.948,31.148 79.299,30.797 107.859,30.797 v1(110.806,33.745)
LCD_DCLK: LCD1.37 U1.78 | length 84.6
  Top Layer w0.152: U1.78@60.466,40.817 60.468,40.815 61.157,40.815 v1(61.192,40.781) ; v1(112.339,49.991) 113.098,50.75 LCD1.37@118.999,50.75
  Bottom Layer w0.152: v1(61.192,40.781) 61.192,43.229 61.763,43.8 69.353,43.8 70.377,42.777 70.377,39.454 70.799,39.032 72.005,39.032 72.081,39.032 ccw(c72.081,39.235) 72.284,39.235 72.284,39.286 cw(c72.488,39.286) 72.691,39.286 72.691,38.865 ccw(c72.894,38.865) 73.097,38.865 73.097,39.286 cw(c73.3,39.286) 73.504,39.286 73.504,38.865 ccw(c73.707,38.865) 73.91,38.865 73.91,39.286 cw(c74.113,39.286) 74.316,39.286 74.316,38.865 ccw(c74.52,38.865) 74.723,38.865 74.723,39.286 cw(c74.926,39.286) 75.129,39.286 75.129,38.865 ccw(c75.332,38.865) 75.536,38.865 75.536,39.246 cw(c75.739,39.246) 75.942,39.246 75.942,39.032 ccw(c76.145,39.032) 76.348,39.032 76.348,39.235 cw(c76.552,39.235) 76.755,39.235 ccw(c76.958,39.235) 76.958,39.032 80.816,39.032 82.295,39.032 82.731,39.468 84.211,39.468 85.33,40.587 85.33,43.279 85.851,43.8 87.259,43.8 90.229,40.83 99.877,40.83 100.343,41.296 110.414,41.296 112.261,43.143 112.261,49.461 112.339,49.539 v1(112.339,49.991)
LCD_DE: LCD1.9 U1.44 | length 84.6
  Top Layer w0.152: U1.44@68.191,46.092 68.191,46.846 68.027,47.01 68.027,48.892 v1(68.289,49.154) ; v1(108.369,42.591) 108.369,40.08 111.699,36.75 LCD1.9@118.999,36.75
  Bottom Layer w0.152: v1(68.289,49.154) 68.289,46.655 71.364,43.581 72.109,43.581 72.513,43.581 cw(c72.513,43.378) 72.716,43.378 72.716,43.034 ccw(c72.92,43.034) 73.123,43.034 73.123,43.549 cw(c73.326,43.549) 73.529,43.549 73.529,43.034 ccw(c73.732,43.034) 73.936,43.034 73.936,43.549 cw(c74.139,43.549) 74.342,43.549 74.342,43.034 ccw(c74.545,43.034) 74.748,43.034 74.748,43.549 cw(c74.952,43.549) 75.155,43.549 75.155,43.034 ccw(c75.358,43.034) 75.561,43.034 75.561,43.549 cw(c75.764,43.549) 75.968,43.549 75.968,43.034 ccw(c76.171,43.034) 76.374,43.034 76.374,43.549 cw(c76.577,43.549) 76.78,43.549 76.78,43.034 ccw(c76.984,43.034) 77.187,43.034 77.187,43.549 cw(c77.39,43.549) 77.593,43.549 77.593,43.034 ccw(c77.796,43.034) 78,43.034 78,43.549 cw(c78.203,43.549) 78.406,43.549 78.406,43.034 ccw(c78.609,43.034) 78.812,43.034 78.812,43.549 cw(c79.016,43.549) 79.219,43.549 79.219,43.034 ccw(c79.422,43.034) 79.625,43.034 79.625,43.549 cw(c79.828,43.549) 80.032,43.549 80.032,43.034 ccw(c80.235,43.034) 80.438,43.034 80.438,43.549 cw(c80.641,43.549) 80.844,43.549 80.844,43.034 ccw(c81.048,43.034) 81.251,43.034 81.251,43.549 cw(c81.454,43.549) 81.657,43.549 81.657,43.034 ccw(c81.86,43.034) 82.064,43.034 82.064,43.549 cw(c82.267,43.549) 82.47,43.549 82.47,43.034 ccw(c82.673,43.034) 82.876,43.034 82.876,43.378 cw(c83.08,43.378) 83.08,43.581 83.156,43.581 83.275,43.581 84.333,44.638 89.113,44.638 91.161,42.591 93.891,42.591 94.373,42.591 cw(c94.373,42.388) 94.576,42.388 94.576,42.207 ccw(c94.78,42.207) 94.983,42.207 94.983,42.443 cw(c95.186,42.443) 95.389,42.443 95.389,42.207 ccw(c95.592,42.207) 95.796,42.207 95.796,42.443 cw(c95.999,42.443) 96.202,42.443 96.202,42.25 ccw(c96.405,42.25) 96.608,42.25 96.608,42.388 cw(c96.812,42.388) 96.812,42.591 98.092,42.591 v1(108.369,42.591)
LCD_G2: LCD1.27 U1.41 | length 84.5
  Top Layer w0.152: v1(69.062,48.193) 69.062,47.304 69.241,47.124 U1.41@69.241,46.092 ; v1(110.955,45.51) 116.572,45.51 116.812,45.75 LCD1.27@118.999,45.75
  Bottom Layer w0.152: v1(69.062,48.193) 69.04,48.171 69.04,46.553 70.526,45.067 70.636,44.956 71.121,44.956 cw(c71.121,44.753) 71.324,44.753 ccw(c71.527,44.753) 71.73,44.753 71.73,44.956 cw(c71.934,44.956) 72.137,44.956 72.137,44.344 ccw(c72.34,44.344) 72.543,44.344 72.543,45.107 cw(c72.746,45.107) 72.95,45.107 72.95,44.235 ccw(c73.153,44.235) 73.356,44.235 73.356,45.107 cw(c73.559,45.107) 73.762,45.107 73.762,44.235 ccw(c73.966,44.235) 74.169,44.235 74.169,45.107 cw(c74.372,45.107) 74.575,45.107 74.575,44.235 ccw(c74.778,44.235) 74.982,44.235 74.982,44.96 cw(c75.185,44.96) 75.388,44.96 75.388,44.235 ccw(c75.591,44.235) 75.794,44.235 75.794,44.959 cw(c75.998,44.959) 76.201,44.959 76.201,44.235 ccw(c76.404,44.235) 76.607,44.235 76.607,44.959 cw(c76.81,44.959) 77.014,44.959 77.014,44.235 ccw(c77.217,44.235) 77.42,44.235 77.42,44.959 cw(c77.623,44.959) 77.826,44.959 77.826,44.235 ccw(c78.03,44.235) 78.233,44.235 78.233,44.959 cw(c78.436,44.959) 78.639,44.959 78.639,44.235 ccw(c78.842,44.235) 79.046,44.235 79.046,44.959 cw(c79.249,44.959) 79.452,44.959 79.452,44.235 ccw(c79.655,44.235) 79.858,44.235 79.858,44.959 cw(c80.062,44.959) 80.265,44.959 80.265,44.235 ccw(c80.468,44.235) 80.671,44.235 80.671,44.959 cw(c80.874,44.959) 81.078,44.959 81.078,44.235 ccw(c81.281,44.235) 81.484,44.235 81.484,44.959 cw(c81.687,44.959) 81.89,44.959 81.89,44.235 ccw(c82.094,44.235) 82.297,44.235 82.297,44.959 cw(c82.5,44.959) 82.703,44.959 82.703,44.46 ccw(c82.906,44.46) 83.11,44.46 83.11,44.753 cw(c83.313,44.753) 83.313,44.956 83.389,44.956 89.656,44.956 91.517,43.095 109.863,43.095 110.955,44.187 v1(110.955,45.51)
LCD_G3: LCD1.26 U1.106 | length 84.6
  Top Layer w0.152: U1.106@64.341,33.792 64.343,33.793 64.343,34.482 v1(64.355,34.495) ; v1(117.206,45.273) 117.217,45.262 118.988,45.262 LCD1.26@118.999,45.25
  Bottom Layer w0.152: v1(64.355,34.495) 64.728,34.868 80.496,34.868 81.148,34.216 81.589,34.216 81.665,34.216 ccw(c81.665,34.419) 81.868,34.419 81.868,34.664 cw(c82.072,34.664) 82.275,34.664 82.275,33.368 ccw(c82.478,33.368) 82.681,33.368 82.681,34.664 cw(c82.884,34.664) 83.088,34.664 83.088,33.629 ccw(c83.291,33.629) 83.494,33.629 83.494,34.664 cw(c83.697,34.664) 83.9,34.664 83.9,33.666 ccw(c84.104,33.666) 84.307,33.666 84.307,34.664 cw(c84.51,34.664) 84.713,34.664 84.713,33.666 ccw(c84.916,33.666) 85.12,33.666 85.12,34.664 cw(c85.323,34.664) 85.526,34.664 85.526,33.666 ccw(c85.729,33.666) 85.932,33.666 85.932,34.664 cw(c86.136,34.664) 86.339,34.664 86.339,33.666 ccw(c86.542,33.666) 86.745,33.666 86.745,34.664 cw(c86.948,34.664) 87.152,34.664 87.152,33.666 ccw(c87.355,33.666) 87.558,33.666 87.558,34.664 cw(c87.761,34.664) 87.964,34.664 87.964,33.666 ccw(c88.168,33.666) 88.371,33.666 88.371,34.657 cw(c88.574,34.657) 88.777,34.657 88.777,34.012 ccw(c88.98,34.012) 89.184,34.012 cw(c89.387,34.012) 89.387,34.216 90.916,34.216 100.202,34.216 101.251,33.167 106.71,33.167 115.538,41.995 115.538,44.42 116.391,45.273 v1(117.206,45.273)
LCD_G4: LCD1.25 U1.61 | length 84.6
  Top Layer w0.152: v1(62.031,45.238) 62.031,45.286 62.241,45.497 U1.61@62.241,46.092 ; v1(111.528,44.734) 111.536,44.742 118.991,44.742 LCD1.25@118.999,44.75
  Bottom Layer w0.152: v1@62.031,45.235 62.533,45.235 62.609,45.235 ccw(c62.609,45.438) 62.812,45.438 62.812,45.471 cw(c63.015,45.471) 63.219,45.471 63.219,44.82 ccw(c63.422,44.82) 63.625,44.82 63.625,45.471 cw(c63.828,45.471) 64.031,45.471 64.031,44.82 ccw(c64.235,44.82) 64.438,44.82 64.438,45.471 cw(c64.641,45.471) 64.844,45.471 64.844,44.978 ccw(c65.047,44.978) 65.251,44.978 65.251,45.032 cw(c65.454,45.032) 65.454,45.235 68.622,45.235 69.088,45.235 72.34,41.983 72.467,41.983 72.543,41.983 ccw(c72.543,42.199) 72.759,42.199 72.759,42.336 cw(c72.975,42.336) 73.191,42.336 73.191,41.771 ccw(c73.407,41.771) 73.622,41.771 73.622,42.336 cw(c73.838,42.336) 74.054,42.336 74.054,41.771 ccw(c74.27,41.771) 74.486,41.771 74.486,42.336 cw(c74.702,42.336) 74.918,42.336 74.918,41.771 ccw(c75.134,41.771) 75.35,41.771 75.35,42.336 cw(c75.566,42.336) 75.781,42.336 75.781,41.771 ccw(c75.997,41.771) 76.213,41.771 76.213,42.336 cw(c76.429,42.336) 76.645,42.336 76.645,41.771 ccw(c76.861,41.771) 77.077,41.771 77.077,42.343 cw(c77.293,42.343) 77.509,42.343 77.509,41.771 ccw(c77.725,41.771) 77.94,41.771 77.94,42.343 cw(c78.156,42.343) 78.372,42.343 78.372,41.771 ccw(c78.588,41.771) 78.804,41.771 78.804,42.343 cw(c79.02,42.343) 79.236,42.343 79.236,41.771 ccw(c79.452,41.771) 79.668,41.771 79.668,42.343 cw(c79.884,42.343) 80.099,42.343 80.099,41.771 ccw(c80.315,41.771) 80.531,41.771 80.531,42.343 cw(c80.747,42.343) 80.963,42.343 80.963,41.812 ccw(c81.179,41.812) 81.395,41.812 81.395,42.199 cw(c81.611,42.199) 81.827,42.199 ccw(c82.043,42.199) 82.043,41.983 82.838,41.983 82.984,42.129 85.214,44.359 87.999,44.359 90.129,42.23 93.829,42.23 94.444,41.615 99.086,41.615 99.468,41.997 109.49,41.997 111.528,44.035 v1(111.528,44.734)
LCD_G5: LCD1.23 R66.1 | length 64.1
  Top Layer w0.152: R66.1@88.814,46.524 89.79,46.524 90.2,46.935 v1(90.2,50.007) ; v1(109.714,45.469) 109.714,44.99 111.139,43.565 116.898,43.565 117.083,43.75 LCD1.23@118.999,43.75
  Bottom Layer w0.152: v1(90.2,50.007) 90.735,50.542 92.237,50.542 92.72,50.542 cw(c92.72,50.339) 92.923,50.339 92.923,50.027 ccw(c93.126,50.027) 93.329,50.027 93.329,50.571 cw(c93.532,50.571) 93.736,50.571 93.736,50.027 ccw(c93.939,50.027) 94.142,50.027 94.142,50.571 cw(c94.345,50.571) 94.548,50.571 94.548,50.027 ccw(c94.752,50.027) 94.955,50.027 94.955,50.571 cw(c95.158,50.571) 95.361,50.571 95.361,50.027 ccw(c95.564,50.027) 95.768,50.027 95.768,50.571 cw(c95.971,50.571) 96.174,50.571 96.174,50.027 ccw(c96.377,50.027) 96.58,50.027 96.58,50.571 cw(c96.784,50.571) 96.987,50.571 96.987,50.027 ccw(c97.19,50.027) 97.393,50.027 97.393,50.571 cw(c97.596,50.571) 97.8,50.571 97.8,50.027 ccw(c98.003,50.027) 98.206,50.027 98.206,50.571 cw(c98.409,50.571) 98.612,50.571 98.612,50.027 ccw(c98.816,50.027) 99.019,50.027 99.019,50.571 cw(c99.222,50.571) 99.425,50.571 99.425,50.027 ccw(c99.628,50.027) 99.832,50.027 99.832,50.571 cw(c100.035,50.571) 100.238,50.571 100.238,50.027 ccw(c100.441,50.027) 100.644,50.027 100.644,50.571 cw(c100.848,50.571) 101.051,50.571 101.051,50.027 ccw(c101.254,50.027) 101.457,50.027 101.457,50.571 cw(c101.66,50.571) 101.864,50.571 101.864,50.027 ccw(c102.067,50.027) 102.27,50.027 102.27,50.571 cw(c102.473,50.571) 102.676,50.571 102.676,50.027 ccw(c102.88,50.027) 103.083,50.027 103.083,50.571 cw(c103.286,50.571) 103.489,50.571 103.489,50.027 ccw(c103.692,50.027) 103.896,50.027 103.896,50.571 cw(c104.099,50.571) 104.302,50.571 104.302,50.027 ccw(c104.505,50.027) 104.708,50.027 104.708,50.571 cw(c104.912,50.571) 105.115,50.571 105.115,50.344 ccw(c105.318,50.344) 105.521,50.344 105.521,50.542 cw(c105.724,50.542) 105.928,50.542 105.928,50.339 ccw(c106.131,50.339) 106.334,50.339 cw(c106.537,50.339) 106.537,50.542 107.012,50.542 108.971,50.542 109.714,49.8 v1(109.714,45.469) v1@109.714,45.438
LCD_G6: LCD1.22 U1.109 | length 84.6
  Top Layer w0.152: v1(65.391,32.262) 65.391,32.934 U1.109@65.391,33.792 ; v1(117.451,43.204) 117.474,43.227 118.976,43.227 LCD1.22@118.999,43.25
  Bottom Layer w0.152: v1(65.391,32.262) 65.398,32.269 65.398,33.12 65.969,33.69 71.709,33.69 72.765,32.634 78.889,32.634 79.734,31.789 90.476,31.789 90.552,31.789 ccw(c90.552,31.992) 90.755,31.992 90.755,32.402 cw(c90.958,32.402) 91.161,32.402 91.161,31.776 ccw(c91.365,31.776) 91.568,31.776 91.568,32.402 cw(c91.771,32.402) 91.974,32.402 91.974,31.776 ccw(c92.177,31.776) 92.381,31.776 92.381,32.402 cw(c92.584,32.402) 92.787,32.402 92.787,31.776 ccw(c92.99,31.776) 93.193,31.776 93.193,32.402 cw(c93.397,32.402) 93.6,32.402 93.6,31.776 ccw(c93.803,31.776) 94.006,31.776 94.006,32.402 cw(c94.209,32.402) 94.413,32.402 94.413,31.776 ccw(c94.616,31.776) 94.819,31.776 94.819,32.402 cw(c95.022,32.402) 95.225,32.402 95.225,31.776 ccw(c95.429,31.776) 95.632,31.776 95.632,32.402 cw(c95.835,32.402) 96.038,32.402 96.038,31.776 ccw(c96.241,31.776) 96.445,31.776 96.445,32.402 cw(c96.648,32.402) 96.851,32.402 96.851,31.776 ccw(c97.054,31.776) 97.257,31.776 97.257,32.402 cw(c97.461,32.402) 97.664,32.402 97.664,31.776 ccw(c97.867,31.776) 98.07,31.776 98.07,32.402 cw(c98.273,32.402) 98.477,32.402 98.477,31.776 ccw(c98.68,31.776) 98.883,31.776 98.883,32.402 cw(c99.086,32.402) 99.289,32.402 99.289,31.776 ccw(c99.493,31.776) 99.696,31.776 99.696,32.402 cw(c99.899,32.402) 100.102,32.402 100.102,31.776 ccw(c100.305,31.776) 100.509,31.776 100.509,32.31 cw(c100.712,32.31) 100.915,32.31 100.915,31.992 ccw(c101.118,31.992) 101.118,31.789 101.708,31.789 106.705,31.789 115.295,40.379 116.555,40.379 117.451,41.275 v1(117.451,43.204)
LCD_G7: LCD1.21 U1.68 | length 84.6
  Top Layer w0.152: U1.68@60.466,44.317 U1.68@60.466,44.317 61.312,44.318 v1(61.325,44.331) ; v1(111.002,42.632) 111.389,43.019 111.57,43.2 116.45,43.2 116.899,42.75 LCD1.21@118.999,42.75
  Bottom Layer w0.152: v1(61.325,44.331) 61.332,44.338 69.43,44.338 70.834,42.934 70.834,41.555 71.146,41.243 71.264,41.124 71.946,41.124 cw(c71.946,40.883) 72.188,40.883 72.188,40.223 ccw(c72.429,40.223) 72.67,40.223 72.67,40.976 cw(c72.911,40.976) 73.153,40.976 73.153,40.223 ccw(c73.394,40.223) 73.635,40.223 73.635,40.976 cw(c73.877,40.976) 74.118,40.976 74.118,40.223 ccw(c74.359,40.223) 74.601,40.223 74.601,40.976 cw(c74.842,40.976) 75.083,40.976 75.083,40.223 ccw(c75.324,40.223) 75.566,40.223 75.566,40.883 cw(c75.807,40.883) 75.807,41.124 79.668,41.124 cw(c79.668,40.883) 79.909,40.883 79.909,40.223 ccw(c80.15,40.223) 80.392,40.223 80.392,40.976 cw(c80.633,40.976) 80.874,40.976 80.874,40.223 ccw(c81.116,40.223) 81.357,40.223 81.357,40.976 cw(c81.598,40.976) 81.84,40.976 81.84,40.223 ccw(c82.081,40.223) 82.322,40.223 82.322,40.976 cw(c82.563,40.976) 82.805,40.976 82.805,40.233 ccw(c83.046,40.233) 83.287,40.233 83.287,40.883 cw(c83.529,40.883) 83.529,41.124 84.124,41.124 84.231,41.124 84.999,41.893 84.999,43.491 85.588,44.08 87.698,44.08 90.551,41.226 90.831,41.226 90.908,41.226 ccw(c90.908,41.429) 91.111,41.429 91.111,41.747 cw(c91.314,41.747) 91.517,41.747 91.517,41.361 ccw(c91.72,41.361) 91.924,41.361 91.924,41.747 cw(c92.127,41.747) 92.33,41.747 92.33,41.361 ccw(c92.533,41.361) 92.736,41.361 92.736,41.709 cw(c92.94,41.709) 93.143,41.709 93.143,41.429 ccw(c93.346,41.429) 93.346,41.226 94.065,41.226 99.575,41.226 99.99,41.641 110.011,41.641 v1(111.002,42.632)
LCD_HS: LCD1.11 R32.1 | length 73.5
  Top Layer w0.152: R32.1@53.237,29.932 53.279,29.89 v1(53.958,29.89) ; v1(117.613,37.753) 117.614,37.752 118.998,37.752 LCD1.11@118.999,37.75
  Bottom Layer w0.152: v1(53.958,29.89) 53.966,29.89 58.196,25.66 78.809,25.66 80.815,27.667 108.128,27.667 115.894,35.433 115.894,37.034 116.613,37.753 v1(117.613,37.753)
LCD_R3: LCD1.34 U1.99 | length 84.6
  Top Layer w0.152: U1.99@61.891,33.792 U1.99@61.891,33.792 61.893,34.473 v1(61.902,34.482) ; v1(114.277,49.292) 114.298,49.271 118.978,49.271 LCD1.34@118.999,49.25
  Bottom Layer w0.152: v1(61.902,34.482) 61.902,34.912 62.417,35.426 84.372,35.426 86.074,35.426 ccw(c86.074,35.63) 86.277,35.63 86.277,36.054 cw(c86.481,36.054) 86.684,36.054 86.684,35.63 ccw(c86.887,35.63) 87.09,35.63 87.09,36.375 cw(c87.293,36.375) 87.497,36.375 87.497,35.63 ccw(c87.7,35.63) 87.903,35.63 87.903,36.139 cw(c88.106,36.139) 88.309,36.139 88.309,35.63 ccw(c88.513,35.63) 88.513,35.426 89.018,35.426 89.219,35.626 89.728,36.136 93.022,36.136 93.098,36.136 ccw(c93.098,36.339) 93.301,36.339 93.301,36.375 cw(c93.504,36.375) 93.708,36.375 93.708,36.136 ccw(c93.911,36.136) 94.114,36.136 94.114,36.375 cw(c94.317,36.375) 94.52,36.375 94.52,36.136 ccw(c94.724,36.136) 94.927,36.136 94.927,36.375 cw(c95.13,36.375) 95.333,36.375 95.333,36.136 ccw(c95.536,36.136) 95.74,36.136 95.74,36.375 cw(c95.943,36.375) 96.146,36.375 96.146,36.136 ccw(c96.349,36.136) 96.552,36.136 96.552,36.375 cw(c96.756,36.375) 96.959,36.375 96.959,36.136 ccw(c97.162,36.136) 97.365,36.136 97.365,36.375 cw(c97.568,36.375) 97.772,36.375 97.772,36.136 ccw(c97.975,36.136) 98.178,36.136 98.178,36.375 cw(c98.381,36.375) 98.584,36.375 98.584,36.136 ccw(c98.788,36.136) 98.991,36.136 98.991,36.375 cw(c99.194,36.375) 99.397,36.375 99.397,35.865 ccw(c99.6,35.865) 99.804,35.865 99.804,36.375 cw(c100.007,36.375) 100.21,36.375 100.21,35.767 ccw(c100.413,35.767) 100.616,35.767 100.616,35.932 cw(c100.82,35.932) 100.82,36.136 101.508,36.136 101.582,36.062 103.734,33.91 106.121,33.91 114.277,42.065 v1(114.277,49.292)